# EAGLE board untitled (EAGLE 9.6.2), part 1 of 2
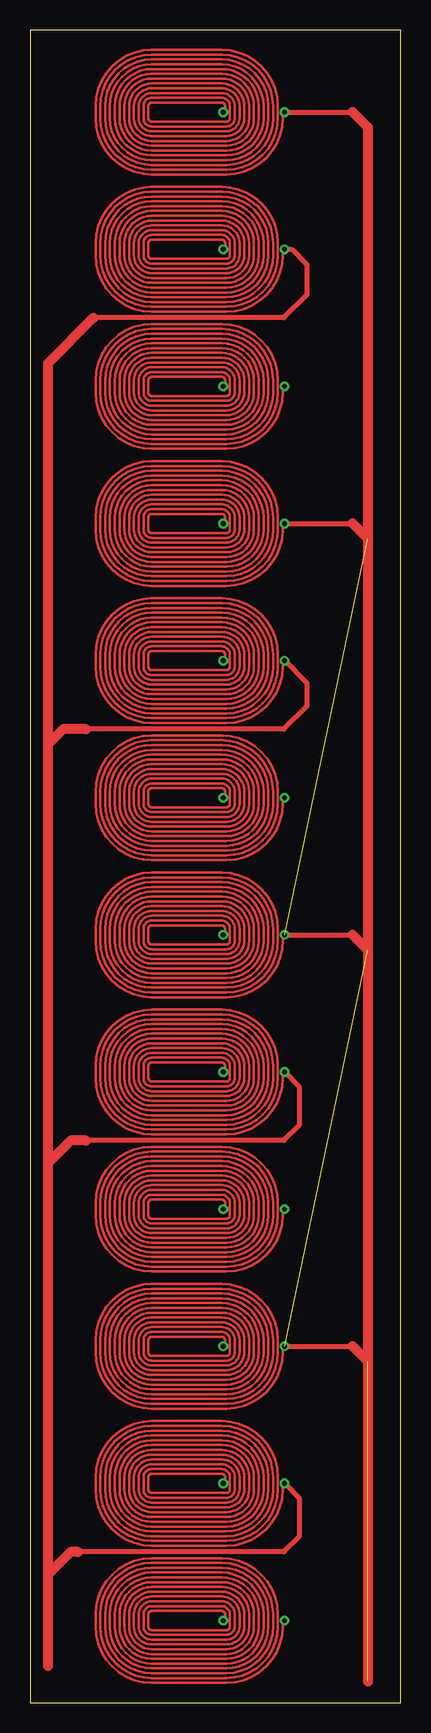
[diagram p0: board, top side]

Size 30.9 x 139.43 mm. Coordinates in mm from the lower left corner, seen from the top.
Outline: 0,0 30.9,0 30.9,139.43 0,139.43 0,0
Copper layers (1*16): Top 0.035mm / dielectric 1.5mm / Bottom 0.035mm
Design rules "default": minimum track width 6mil, minimum drill 0.35mm, track to track 6mil, track to pad 6mil, pad to pad 6mil, via to via 6mil, smd to smd 6mil, copper to edge 40mil, drill to drill 6mil, minimum pad ring 10mil, minimum via ring 8mil, stop-mask expansion 4mil, vias tented up to drill 0mil, thermal gap 10mil

## Placement (x,y rotation side)

## Tracks (layer width: path | path; a pad name or v marks a point on that pad's centre or on a via)
S$1  (via drill 0.4 pad 0.5)
  Top 0.2: v16.11,18.28 16.26,18.28 16.26,18.78 16.26,18.83 16.25,18.87 16.23,18.92 16.2,18.96 16.17,18.99 16.14,19.02 16.1,19.05 16.05,19.07 16.01,19.08 15.96,19.08 10.16,19.08 10.11,19.08 10.07,19.07 10.02,19.05 9.98,19.02 9.95,18.99 9.92,18.96 9.89,18.92 9.88,18.87 9.86,18.83 9.86,18.78 9.86,17.78 9.86,17.73 9.88,17.69 9.89,17.64 9.92,17.6 9.95,17.57 9.98,17.54 10.02,17.51 10.07,17.5 10.11,17.48 10.16,17.48 16.36,17.48 16.41,17.48 16.45,17.5 16.5,17.51 16.54,17.54 16.57,17.57 16.6,17.6 16.63,17.64 16.64,17.69 16.66,17.73 16.66,17.78 16.66,18.78 16.65,18.89 16.63,19 16.58,19.1 16.53,19.19 16.45,19.28 16.37,19.35 16.28,19.4 16.18,19.45 16.07,19.47 15.96,19.48 10.16,19.48 10.05,19.47 9.94,19.45 9.84,19.4 9.75,19.35 9.66,19.28 9.59,19.19 9.54,19.1 9.49,19 9.47,18.89 9.46,18.78 9.46,17.78 9.47,17.67 9.49,17.56 9.54,17.46 9.59,17.37 9.66,17.29 9.75,17.21 9.84,17.16 9.94,17.11 10.05,17.09 10.16,17.08 16.36,17.08 16.47,17.09 16.58,17.11 16.68,17.16 16.77,17.21 16.86,17.29 16.93,17.37 16.98,17.46 17.03,17.56 17.05,17.67 17.06,17.78 17.06,18.78 17.05,18.95 17.01,19.12 16.94,19.28 16.85,19.43 16.74,19.56 16.61,19.67 16.46,19.76 16.3,19.83 16.13,19.87 15.96,19.88 10.16,19.88 9.99,19.87 9.82,19.83 9.66,19.76 9.51,19.67 9.38,19.56 9.27,19.43 9.18,19.28 9.11,19.12 9.07,18.95 9.06,18.78 9.06,17.78 9.07,17.61 9.11,17.44 9.18,17.28 9.27,17.13 9.38,17 9.51,16.89 9.66,16.8 9.82,16.73 9.99,16.69 10.16,16.68 16.36,16.68 16.53,16.69 16.7,16.73 16.86,16.8 17.01,16.89 17.14,17 17.25,17.13 17.34,17.28 17.41,17.44 17.45,17.61 17.46,17.78 17.46,18.78 17.44,19.02 17.39,19.24 17.3,19.46 17.17,19.66 17.02,19.84 16.84,19.99 16.64,20.12 16.42,20.21 16.2,20.26 15.96,20.28 10.16,20.28 9.93,20.26 9.7,20.21 9.48,20.12 9.28,19.99 9.1,19.84 8.95,19.66 8.82,19.46 8.73,19.24 8.68,19.02 8.66,18.78 8.66,17.78 8.68,17.55 8.73,17.32 8.82,17.1 8.95,16.9 9.1,16.72 9.28,16.57 9.48,16.44 9.7,16.35 9.93,16.3 10.16,16.28 16.36,16.28 16.59,16.3 16.82,16.35 17.04,16.44 17.24,16.57 17.42,16.72 17.57,16.9 17.7,17.1 17.79,17.32 17.84,17.55 17.86,17.78 17.86,18.78 17.84,19.08 17.77,19.37 17.65,19.64 17.5,19.9 17.3,20.12 17.08,20.32 16.82,20.47 16.55,20.59 16.26,20.66 15.96,20.68 10.16,20.68 9.86,20.66 9.57,20.59 9.3,20.47 9.04,20.32 8.82,20.12 8.62,19.9 8.47,19.64 8.35,19.37 8.28,19.08 8.26,18.78 8.26,17.78 8.28,17.48 8.35,17.19 8.47,16.92 8.62,16.66 8.82,16.44 9.04,16.24 9.3,16.09 9.57,15.97 9.86,15.9 10.16,15.88 16.36,15.88 16.66,15.9 16.95,15.97 17.22,16.09 17.48,16.24 17.7,16.44 17.9,16.66 18.05,16.92 18.17,17.19 18.24,17.48 18.26,17.78 18.26,18.78 18.23,19.14 18.15,19.49 18.01,19.82 17.82,20.13 17.59,20.41 17.31,20.64 17,20.83 16.67,20.97 16.32,21.05 15.96,21.08 10.16,21.08 9.8,21.05 9.45,20.97 9.12,20.83 8.81,20.64 8.53,20.41 8.3,20.13 8.11,19.82 7.97,19.49 7.89,19.14 7.86,18.78 7.86,17.78 7.89,17.42 7.97,17.07 8.11,16.74 8.3,16.43 8.53,16.15 8.81,15.92 9.12,15.73 9.45,15.59 9.8,15.51 10.16,15.48 16.36,15.48 16.72,15.51 17.07,15.59 17.4,15.73 17.71,15.92 17.99,16.15 18.22,16.43 18.41,16.74 18.55,17.07 18.63,17.42 18.66,17.78 18.66,18.78 18.63,19.2 18.53,19.61 18.37,20.01 18.14,20.37 17.87,20.69 17.55,20.96 17.19,21.19 16.79,21.35 16.38,21.45 15.96,21.48 10.16,21.48 9.74,21.45 9.33,21.35 8.93,21.19 8.57,20.96 8.25,20.69 7.98,20.37 7.75,20.01 7.59,19.61 7.49,19.2 7.46,18.78 7.46,17.78 7.49,17.36 7.59,16.95 7.75,16.55 7.98,16.19 8.25,15.87 8.57,15.6 8.93,15.37 9.33,15.21 9.74,15.11 10.16,15.08 16.36,15.08 16.78,15.11 17.19,15.21 17.59,15.37 17.95,15.6 18.27,15.87 18.54,16.19 18.77,16.55 18.93,16.95 19.03,17.36 19.06,17.78 19.06,18.78 19.02,19.27 18.91,19.74 18.72,20.19 18.47,20.6 18.15,20.97 17.78,21.29 17.37,21.54 16.92,21.73 16.45,21.84 15.96,21.88 10.16,21.88 9.68,21.84 9.2,21.73 8.75,21.54 8.34,21.29 7.97,20.97 7.65,20.6 7.4,20.19 7.21,19.74 7.1,19.27 7.06,18.78 7.06,17.78 7.1,17.3 7.21,16.82 7.4,16.37 7.65,15.96 7.97,15.59 8.34,15.27 8.75,15.02 9.2,14.83 9.68,14.72 10.16,14.68 16.36,14.68 16.84,14.72 17.32,14.83 17.77,15.02 18.18,15.27 18.55,15.59 18.87,15.96 19.12,16.37 19.31,16.82 19.42,17.3 19.46,17.78 19.46,18.78 19.42,19.33 19.29,19.86 19.08,20.37 18.79,20.84 18.44,21.26 18.02,21.61 17.55,21.9 17.04,22.11 16.51,22.24 15.96,22.28 10.16,22.28 9.61,22.24 9.08,22.11 8.57,21.9 8.1,21.61 7.69,21.26 7.33,20.84 7.04,20.37 6.83,19.86 6.7,19.33 6.66,18.78 6.66,17.78 6.7,17.23 6.83,16.7 7.04,16.19 7.33,15.72 7.69,15.31 8.1,14.95 8.57,14.66 9.08,14.45 9.61,14.32 10.16,14.28 16.36,14.28 16.91,14.32 17.44,14.45 17.95,14.66 18.42,14.95 18.84,15.31 19.19,15.72 19.48,16.19 19.69,16.7 19.82,17.23 19.86,17.78 19.86,18.78 19.81,19.39 19.67,19.98 19.44,20.55 19.12,21.07 18.72,21.54 18.25,21.94 17.73,22.26 17.16,22.49 16.57,22.63 15.96,22.68 10.16,22.68 9.55,22.63 8.96,22.49 8.39,22.26 7.87,21.94 7.4,21.54 7,21.07 6.69,20.55 6.45,19.98 6.31,19.39 6.26,18.78 6.26,17.78 6.31,17.17 6.45,16.58 6.69,16.01 7,15.49 7.4,15.02 7.87,14.63 8.39,14.31 8.96,14.07 9.55,13.93 10.16,13.88 16.36,13.88 16.97,13.93 17.57,14.07 18.13,14.31 18.65,14.63 19.12,15.02 19.52,15.49 19.84,16.01 20.07,16.58 20.21,17.17 20.26,17.78 20.26,18.78 20.21,19.45 20.05,20.11 19.79,20.73 19.44,21.31 19,21.82 18.49,22.26 17.91,22.61 17.29,22.87 16.63,23.03 15.96,23.08 10.16,23.08 9.49,23.03 8.83,22.87 8.21,22.61 7.63,22.26 7.12,21.82 6.68,21.31 6.33,20.73 6.07,20.11 5.91,19.45 5.86,18.78 5.86,17.78 5.91,17.11 6.07,16.45 6.33,15.83 6.68,15.25 7.12,14.74 7.63,14.3 8.21,13.95 8.83,13.69 9.49,13.53 10.16,13.48 16.36,13.48 17.03,13.53 17.69,13.69 18.31,13.95 18.89,14.3 19.4,14.74 19.84,15.25 20.19,15.83 20.45,16.45 20.61,17.11 20.66,17.78 20.66,18.78 20.6,19.52 20.43,20.23 20.15,20.91 19.76,21.54 19.28,22.1 18.72,22.58 18.09,22.97 17.41,23.25 16.7,23.42 15.96,23.48 10.16,23.48 9.43,23.42 8.71,23.25 8.03,22.97 7.4,22.58 6.84,22.1 6.36,21.54 5.97,20.91 5.69,20.23 5.52,19.52 5.46,18.78 5.46,17.78 5.52,17.05 5.69,16.33 5.97,15.65 6.36,15.02 6.84,14.46 7.4,13.98 8.03,13.59 8.71,13.31 9.43,13.14 10.16,13.08 16.36,13.08 17.09,13.14 17.81,13.31 18.49,13.59 19.12,13.98 19.68,14.46 20.16,15.02 20.55,15.65 20.83,16.33 21,17.05 21.06,17.78 21.06,18.28 v21.21,18.28
  Top 0.2: v16.11,121.15 16.26,121.15 16.26,121.65 16.26,121.7 16.25,121.74 16.23,121.79 16.2,121.83 16.17,121.86 16.14,121.89 16.1,121.92 16.05,121.94 16.01,121.95 15.96,121.95 10.16,121.95 10.11,121.95 10.07,121.94 10.02,121.92 9.98,121.89 9.95,121.86 9.92,121.83 9.89,121.79 9.88,121.74 9.86,121.7 9.86,121.65 9.86,120.65 9.86,120.6 9.88,120.56 9.89,120.51 9.92,120.47 9.95,120.44 9.98,120.41 10.02,120.38 10.07,120.36 10.11,120.35 10.16,120.35 16.36,120.35 16.41,120.35 16.45,120.36 16.5,120.38 16.54,120.41 16.57,120.44 16.6,120.47 16.63,120.51 16.64,120.56 16.66,120.6 16.66,120.65 16.66,121.65 16.65,121.76 16.63,121.87 16.58,121.97 16.53,122.06 16.45,122.14 16.37,122.22 16.28,122.27 16.18,122.32 16.07,122.34 15.96,122.35 10.16,122.35 10.05,122.34 9.94,122.32 9.84,122.27 9.75,122.22 9.66,122.14 9.59,122.06 9.54,121.97 9.49,121.87 9.47,121.76 9.46,121.65 9.46,120.65 9.47,120.54 9.49,120.43 9.54,120.33 9.59,120.24 9.66,120.16 9.75,120.08 9.84,120.03 9.94,119.98 10.05,119.96 10.16,119.95 16.36,119.95 16.47,119.96 16.58,119.98 16.68,120.03 16.77,120.08 16.86,120.16 16.93,120.24 16.98,120.33 17.03,120.43 17.05,120.54 17.06,120.65 17.06,121.65 17.05,121.82 17.01,121.99 16.94,122.15 16.85,122.3 16.74,122.43 16.61,122.54 16.46,122.63 16.3,122.7 16.13,122.74 15.96,122.75 10.16,122.75 9.99,122.74 9.82,122.7 9.66,122.63 9.51,122.54 9.38,122.43 9.27,122.3 9.18,122.15 9.11,121.99 9.07,121.82 9.06,121.65 9.06,120.65 9.07,120.48 9.11,120.31 9.18,120.15 9.27,120 9.38,119.87 9.51,119.76 9.66,119.67 9.82,119.6 9.99,119.56 10.16,119.55 16.36,119.55 16.53,119.56 16.7,119.6 16.86,119.67 17.01,119.76 17.14,119.87 17.25,120 17.34,120.15 17.41,120.31 17.45,120.48 17.46,120.65 17.46,121.65 17.44,121.89 17.39,122.11 17.3,122.33 17.17,122.53 17.02,122.71 16.84,122.86 16.64,122.99 16.42,123.08 16.2,123.13 15.96,123.15 10.16,123.15 9.93,123.13 9.7,123.08 9.48,122.99 9.28,122.86 9.1,122.71 8.95,122.53 8.82,122.33 8.73,122.11 8.68,121.89 8.66,121.65 8.66,120.65 8.68,120.42 8.73,120.19 8.82,119.97 8.95,119.77 9.1,119.59 9.28,119.44 9.48,119.31 9.7,119.22 9.93,119.17 10.16,119.15 16.36,119.15 16.59,119.17 16.82,119.22 17.04,119.31 17.24,119.44 17.42,119.59 17.57,119.77 17.7,119.97 17.79,120.19 17.84,120.42 17.86,120.65 17.86,121.65 17.84,121.95 17.77,122.24 17.65,122.51 17.5,122.77 17.3,122.99 17.08,123.19 16.82,123.34 16.55,123.46 16.26,123.53 15.96,123.55 10.16,123.55 9.86,123.53 9.57,123.46 9.3,123.34 9.04,123.19 8.82,122.99 8.62,122.77 8.47,122.51 8.35,122.24 8.28,121.95 8.26,121.65 8.26,120.65 8.28,120.35 8.35,120.06 8.47,119.79 8.62,119.53 8.82,119.31 9.04,119.11 9.3,118.96 9.57,118.84 9.86,118.77 10.16,118.75 16.36,118.75 16.66,118.77 16.95,118.84 17.22,118.96 17.48,119.11 17.7,119.31 17.9,119.53 18.05,119.79 18.17,120.06 18.24,120.35 18.26,120.65 18.26,121.65 18.23,122.01 18.15,122.36 18.01,122.69 17.82,123 17.59,123.28 17.31,123.51 17,123.7 16.67,123.84 16.32,123.92 15.96,123.95 10.16,123.95 9.8,123.92 9.45,123.84 9.12,123.7 8.81,123.51 8.53,123.28 8.3,123 8.11,122.69 7.97,122.36 7.89,122.01 7.86,121.65 7.86,120.65 7.89,120.29 7.97,119.94 8.11,119.61 8.3,119.3 8.53,119.02 8.81,118.79 9.12,118.6 9.45,118.46 9.8,118.38 10.16,118.35 16.36,118.35 16.72,118.38 17.07,118.46 17.4,118.6 17.71,118.79 17.99,119.02 18.22,119.3 18.41,119.61 18.55,119.94 18.63,120.29 18.66,120.65 18.66,121.65 18.63,122.07 18.53,122.48 18.37,122.88 18.14,123.24 17.87,123.56 17.55,123.83 17.19,124.06 16.79,124.22 16.38,124.32 15.96,124.35 10.16,124.35 9.74,124.32 9.33,124.22 8.93,124.06 8.57,123.83 8.25,123.56 7.98,123.24 7.75,122.88 7.59,122.48 7.49,122.07 7.46,121.65 7.46,120.65 7.49,120.23 7.59,119.82 7.75,119.42 7.98,119.06 8.25,118.74 8.57,118.47 8.93,118.24 9.33,118.08 9.74,117.98 10.16,117.95 16.36,117.95 16.78,117.98 17.19,118.08 17.59,118.24 17.95,118.47 18.27,118.74 18.54,119.06 18.77,119.42 18.93,119.82 19.03,120.23 19.06,120.65 19.06,121.65 19.02,122.14 18.91,122.61 18.72,123.06 18.47,123.47 18.15,123.84 17.78,124.16 17.37,124.41 16.92,124.6 16.45,124.71 15.96,124.75 10.16,124.75 9.68,124.71 9.2,124.6 8.75,124.41 8.34,124.16 7.97,123.84 7.65,123.47 7.4,123.06 7.21,122.61 7.1,122.14 7.06,121.65 7.06,120.65 7.1,120.17 7.21,119.69 7.4,119.24 7.65,118.83 7.97,118.46 8.34,118.14 8.75,117.89 9.2,117.7 9.68,117.59 10.16,117.55 16.36,117.55 16.84,117.59 17.32,117.7 17.77,117.89 18.18,118.14 18.55,118.46 18.87,118.83 19.12,119.24 19.31,119.69 19.42,120.17 19.46,120.65 19.46,121.65 19.42,122.2 19.29,122.73 19.08,123.24 18.79,123.71 18.44,124.12 18.02,124.48 17.55,124.77 17.04,124.98 16.51,125.11 15.96,125.15 10.16,125.15 9.61,125.11 9.08,124.98 8.57,124.77 8.1,124.48 7.69,124.12 7.33,123.71 7.04,123.24 6.83,122.73 6.7,122.2 6.66,121.65 6.66,120.65 6.7,120.1 6.83,119.57 7.04,119.06 7.33,118.59 7.69,118.17 8.1,117.82 8.57,117.53 9.08,117.32 9.61,117.19 10.16,117.15 16.36,117.15 16.91,117.19 17.44,117.32 17.95,117.53 18.42,117.82 18.84,118.17 19.19,118.59 19.48,119.06 19.69,119.57 19.82,120.1 19.86,120.65 19.86,121.65 19.81,122.26 19.67,122.86 19.44,123.42 19.12,123.94 18.72,124.41 18.25,124.81 17.73,125.12 17.16,125.36 16.57,125.5 15.96,125.55 10.16,125.55 9.55,125.5 8.96,125.36 8.39,125.12 7.87,124.81 7.4,124.41 7,123.94 6.69,123.42 6.45,122.86 6.31,122.26 6.26,121.65 6.26,120.65 6.31,120.04 6.45,119.45 6.69,118.88 7,118.36 7.4,117.89 7.87,117.5 8.39,117.17 8.96,116.94 9.55,116.8 10.16,116.75 16.36,116.75 16.97,116.8 17.57,116.94 18.13,117.17 18.65,117.5 19.12,117.89 19.52,118.36 19.84,118.88 20.07,119.45 20.21,120.04 20.26,120.65 20.26,121.65 20.21,122.32 20.05,122.98 19.79,123.6 19.44,124.18 19,124.69 18.49,125.13 17.91,125.48 17.29,125.74 16.63,125.9 15.96,125.95 10.16,125.95 9.49,125.9 8.83,125.74 8.21,125.48 7.63,125.13 7.12,124.69 6.68,124.18 6.33,123.6 6.07,122.98 5.91,122.32 5.86,121.65 5.86,120.65 5.91,119.98 6.07,119.32 6.33,118.7 6.68,118.12 7.12,117.61 7.63,117.17 8.21,116.82 8.83,116.56 9.49,116.4 10.16,116.35 16.36,116.35 17.03,116.4 17.69,116.56 18.31,116.82 18.89,117.17 19.4,117.61 19.84,118.12 20.19,118.7 20.45,119.32 20.61,119.98 20.66,120.65 20.66,121.65 20.6,122.39 20.43,123.1 20.15,123.78 19.76,124.41 19.28,124.97 18.72,125.45 18.09,125.84 17.41,126.12 16.7,126.29 15.96,126.35 10.16,126.35 9.43,126.29 8.71,126.12 8.03,125.84 7.4,125.45 6.84,124.97 6.36,124.41 5.97,123.78 5.69,123.1 5.52,122.39 5.46,121.65 5.46,120.65 5.52,119.92 5.69,119.2 5.97,118.52 6.36,117.89 6.84,117.33 7.4,116.85 8.03,116.46 8.71,116.18 9.43,116.01 10.16,115.95 16.36,115.95 17.09,116.01 17.81,116.18 18.49,116.46 19.12,116.85 19.68,117.33 20.16,117.89 20.55,118.52 20.83,119.2 21,119.92 21.06,120.65 21.06,121.15 v21.21,121.15
  Top 0.2: v16.11,86.86 16.26,86.86 16.26,87.36 16.26,87.41 16.25,87.45 16.23,87.5 16.2,87.54 16.17,87.57 16.14,87.6 16.1,87.63 16.05,87.64 16.01,87.66 15.96,87.66 10.16,87.66 10.11,87.66 10.07,87.64 10.02,87.63 9.98,87.6 9.95,87.57 9.92,87.54 9.89,87.5 9.88,87.45 9.86,87.41 9.86,87.36 9.86,86.36 9.86,86.31 9.88,86.27 9.89,86.22 9.92,86.18 9.95,86.15 9.98,86.12 10.02,86.09 10.07,86.08 10.11,86.06 10.16,86.06 16.36,86.06 16.41,86.06 16.45,86.08 16.5,86.09 16.54,86.12 16.57,86.15 16.6,86.18 16.63,86.22 16.64,86.27 16.66,86.31 16.66,86.36 16.66,87.36 16.65,87.47 16.63,87.58 16.58,87.68 16.53,87.77 16.45,87.86 16.37,87.93 16.28,87.98 16.18,88.03 16.07,88.05 15.96,88.06 10.16,88.06 10.05,88.05 9.94,88.03 9.84,87.98 9.75,87.93 9.66,87.86 9.59,87.77 9.54,87.68 9.49,87.58 9.47,87.47 9.46,87.36 9.46,86.36 9.47,86.25 9.49,86.14 9.54,86.04 9.59,85.95 9.66,85.86 9.75,85.79 9.84,85.74 9.94,85.69 10.05,85.67 10.16,85.66 16.36,85.66 16.47,85.67 16.58,85.69 16.68,85.74 16.77,85.79 16.86,85.86 16.93,85.95 16.98,86.04 17.03,86.14 17.05,86.25 17.06,86.36 17.06,87.36 17.05,87.53 17.01,87.7 16.94,87.86 16.85,88.01 16.74,88.14 16.61,88.25 16.46,88.34 16.3,88.41 16.13,88.45 15.96,88.46 10.16,88.46 9.99,88.45 9.82,88.41 9.66,88.34 9.51,88.25 9.38,88.14 9.27,88.01 9.18,87.86 9.11,87.7 9.07,87.53 9.06,87.36 9.06,86.36 9.07,86.19 9.11,86.02 9.18,85.86 9.27,85.71 9.38,85.58 9.51,85.47 9.66,85.38 9.82,85.31 9.99,85.27 10.16,85.26 16.36,85.26 16.53,85.27 16.7,85.31 16.86,85.38 17.01,85.47 17.14,85.58 17.25,85.71 17.34,85.86 17.41,86.02 17.45,86.19 17.46,86.36 17.46,87.36 17.44,87.59 17.39,87.82 17.3,88.04 17.17,88.24 17.02,88.42 16.84,88.57 16.64,88.7 16.42,88.79 16.2,88.84 15.96,88.86 10.16,88.86 9.93,88.84 9.7,88.79 9.48,88.7 9.28,88.57 9.1,88.42 8.95,88.24 8.82,88.04 8.73,87.82 8.68,87.59 8.66,87.36 8.66,86.36 8.68,86.12 8.73,85.9 8.82,85.68 8.95,85.48 9.1,85.3 9.28,85.15 9.48,85.02 9.7,84.93 9.93,84.88 10.16,84.86 16.36,84.86 16.59,84.88 16.82,84.93 17.04,85.02 17.24,85.15 17.42,85.3 17.57,85.48 17.7,85.68 17.79,85.9 17.84,86.12 17.86,86.36 17.86,87.36 17.84,87.66 17.77,87.95 17.65,88.22 17.5,88.48 17.3,88.7 17.08,88.9 16.82,89.05 16.55,89.17 16.26,89.24 15.96,89.26 10.16,89.26 9.86,89.24 9.57,89.17 9.3,89.05 9.04,88.9 8.82,88.7 8.62,88.48 8.47,88.22 8.35,87.95 8.28,87.66 8.26,87.36 8.26,86.36 8.28,86.06 8.35,85.77 8.47,85.5 8.62,85.24 8.82,85.02 9.04,84.82 9.3,84.67 9.57,84.55 9.86,84.48 10.16,84.46 16.36,84.46 16.66,84.48 16.95,84.55 17.22,84.67 17.48,84.82 17.7,85.02 17.9,85.24 18.05,85.5 18.17,85.77 18.24,86.06 18.26,86.36 18.26,87.36 18.23,87.72 18.15,88.07 18.01,88.4 17.82,88.71 17.59,88.99 17.31,89.22 17,89.41 16.67,89.55 16.32,89.63 15.96,89.66 10.16,89.66 9.8,89.63 9.45,89.55 9.12,89.41 8.81,89.22 8.53,88.99 8.3,88.71 8.11,88.4 7.97,88.07 7.89,87.72 7.86,87.36 7.86,86.36 7.89,86 7.97,85.65 8.11,85.32 8.3,85.01 8.53,84.73 8.81,84.5 9.12,84.31 9.45,84.17 9.8,84.09 10.16,84.06 16.36,84.06 16.72,84.09 17.07,84.17 17.4,84.31 17.71,84.5 17.99,84.73 18.22,85.01 18.41,85.32 18.55,85.65 18.63,86 18.66,86.36 18.66,87.36 18.63,87.78 18.53,88.19 18.37,88.59 18.14,88.95 17.87,89.27 17.55,89.54 17.19,89.77 16.79,89.93 16.38,90.03 15.96,90.06 10.16,90.06 9.74,90.03 9.33,89.93 8.93,89.77 8.57,89.54 8.25,89.27 7.98,88.95 7.75,88.59 7.59,88.19 7.49,87.78 7.46,87.36 7.46,86.36 7.49,85.94 7.59,85.53 7.75,85.13 7.98,84.77 8.25,84.45 8.57,84.18 8.93,83.95 9.33,83.79 9.74,83.69 10.16,83.66 16.36,83.66 16.78,83.69 17.19,83.79 17.59,83.95 17.95,84.18 18.27,84.45 18.54,84.77 18.77,85.13 18.93,85.53 19.03,85.94 19.06,86.36 19.06,87.36 19.02,87.84 18.91,88.32 18.72,88.77 18.47,89.18 18.15,89.55 17.78,89.87 17.37,90.12 16.92,90.31 16.45,90.42 15.96,90.46 10.16,90.46 9.68,90.42 9.2,90.31 8.75,90.12 8.34,89.87 7.97,89.55 7.65,89.18 7.4,88.77 7.21,88.32 7.1,87.84 7.06,87.36 7.06,86.36 7.1,85.88 7.21,85.4 7.4,84.95 7.65,84.54 7.97,84.17 8.34,83.85 8.75,83.6 9.2,83.41 9.68,83.3 10.16,83.26 16.36,83.26 16.84,83.3 17.32,83.41 17.77,83.6 18.18,83.85 18.55,84.17 18.87,84.54 19.12,84.95 19.31,85.4 19.42,85.88 19.46,86.36 19.46,87.36 19.42,87.91 19.29,88.44 19.08,88.95 18.79,89.42 18.44,89.84 18.02,90.19 17.55,90.48 17.04,90.69 16.51,90.82 15.96,90.86 10.16,90.86 9.61,90.82 9.08,90.69 8.57,90.48 8.1,90.19 7.69,89.84 7.33,89.42 7.04,88.95 6.83,88.44 6.7,87.91 6.66,87.36 6.66,86.36 6.7,85.81 6.83,85.28 7.04,84.77 7.33,84.3 7.69,83.89 8.1,83.53 8.57,83.24 9.08,83.03 9.61,82.9 10.16,82.86 16.36,82.86 16.91,82.9 17.44,83.03 17.95,83.24 18.42,83.53 18.84,83.89 19.19,84.3 19.48,84.77 19.69,85.28 19.82,85.81 19.86,86.36 19.86,87.36 19.81,87.97 19.67,88.56 19.44,89.13 19.12,89.65 18.72,90.12 18.25,90.52 17.73,90.84 17.16,91.07 16.57,91.21 15.96,91.26 10.16,91.26 9.55,91.21 8.96,91.07 8.39,90.84 7.87,90.52 7.4,90.12 7,89.65 6.69,89.13 6.45,88.56 6.31,87.97 6.26,87.36 6.26,86.36 6.31,85.75 6.45,85.16 6.69,84.59 7,84.07 7.4,83.6 7.87,83.2 8.39,82.89 8.96,82.65 9.55,82.51 10.16,82.46 16.36,82.46 16.97,82.51 17.57,82.65 18.13,82.89 18.65,83.2 19.12,83.6 19.52,84.07 19.84,84.59 20.07,85.16 20.21,85.75 20.26,86.36 20.26,87.36 20.21,88.03 20.05,88.69 19.79,89.31 19.44,89.89 19,90.4 18.49,90.84 17.91,91.19 17.29,91.45 16.63,91.61 15.96,91.66 10.16,91.66 9.49,91.61 8.83,91.45 8.21,91.19 7.63,90.84 7.12,90.4 6.68,89.89 6.33,89.31 6.07,88.69 5.91,88.03 5.86,87.36 5.86,86.36 5.91,85.69 6.07,85.03 6.33,84.41 6.68,83.83 7.12,83.32 7.63,82.88 8.21,82.53 8.83,82.27 9.49,82.11 10.16,82.06 16.36,82.06 17.03,82.11 17.69,82.27 18.31,82.53 18.89,82.88 19.4,83.32 19.84,83.83 20.19,84.41 20.45,85.03 20.61,85.69 20.66,86.36 20.66,87.36 20.6,88.09 20.43,88.81 20.15,89.49 19.76,90.12 19.28,90.68 18.72,91.16 18.09,91.55 17.41,91.83 16.7,92 15.96,92.06 10.16,92.06 9.43,92 8.71,91.83 8.03,91.55 7.4,91.16 6.84,90.68 6.36,90.12 5.97,89.49 5.69,88.81 5.52,88.09 5.46,87.36 5.46,86.36 5.52,85.62 5.69,84.91 5.97,84.23 6.36,83.6 6.84,83.04 7.4,82.56 8.03,82.17 8.71,81.89 9.43,81.72 10.16,81.66 16.36,81.66 17.09,81.72 17.81,81.89 18.49,82.17 19.12,82.56 19.68,83.04 20.16,83.6 20.55,84.23 20.83,84.91 21,85.62 21.06,86.36 21.06,86.86 v21.21,86.86
  Top 0.2: v16.11,52.57 16.26,52.57 16.26,53.07 16.26,53.12 16.25,53.16 16.23,53.21 16.2,53.25 16.17,53.28 16.14,53.31 16.1,53.34 16.05,53.36 16.01,53.37 15.96,53.37 10.16,53.37 10.11,53.37 10.07,53.36 10.02,53.34 9.98,53.31 9.95,53.28 9.92,53.25 9.89,53.21 9.88,53.16 9.86,53.12 9.86,53.07 9.86,52.07 9.86,52.02 9.88,51.98 9.89,51.93 9.92,51.89 9.95,51.86 9.98,51.83 10.02,51.8 10.07,51.79 10.11,51.77 10.16,51.77 16.36,51.77 16.41,51.77 16.45,51.79 16.5,51.8 16.54,51.83 16.57,51.86 16.6,51.89 16.63,51.93 16.64,51.98 16.66,52.02 16.66,52.07 16.66,53.07 16.65,53.18 16.63,53.29 16.58,53.39 16.53,53.48 16.45,53.56 16.37,53.64 16.28,53.69 16.18,53.74 16.07,53.76 15.96,53.77 10.16,53.77 10.05,53.76 9.94,53.74 9.84,53.69 9.75,53.64 9.66,53.56 9.59,53.48 9.54,53.39 9.49,53.29 9.47,53.18 9.46,53.07 9.46,52.07 9.47,51.96 9.49,51.85 9.54,51.75 9.59,51.66 9.66,51.58 9.75,51.5 9.84,51.45 9.94,51.4 10.05,51.38 10.16,51.37 16.36,51.37 16.47,51.38 16.58,51.4 16.68,51.45 16.77,51.5 16.86,51.58 16.93,51.66 16.98,51.75 17.03,51.85 17.05,51.96 17.06,52.07 17.06,53.07 17.05,53.24 17.01,53.41 16.94,53.57 16.85,53.72 16.74,53.85 16.61,53.96 16.46,54.05 16.3,54.12 16.13,54.16 15.96,54.17 10.16,54.17 9.99,54.16 9.82,54.12 9.66,54.05 9.51,53.96 9.38,53.85 9.27,53.72 9.18,53.57 9.11,53.41 9.07,53.24 9.06,53.07 9.06,52.07 9.07,51.9 9.11,51.73 9.18,51.57 9.27,51.42 9.38,51.29 9.51,51.18 9.66,51.09 9.82,51.02 9.99,50.98 10.16,50.97 16.36,50.97 16.53,50.98 16.7,51.02 16.86,51.09 17.01,51.18 17.14,51.29 17.25,51.42 17.34,51.57 17.41,51.73 17.45,51.9 17.46,52.07 17.46,53.07 17.44,53.3 17.39,53.53 17.3,53.75 17.17,53.95 17.02,54.13 16.84,54.28 16.64,54.41 16.42,54.5 16.2,54.55 15.96,54.57 10.16,54.57 9.93,54.55 9.7,54.5 9.48,54.41 9.28,54.28 9.1,54.13 8.95,53.95 8.82,53.75 8.73,53.53 8.68,53.3 8.66,53.07 8.66,52.07 8.68,51.84 8.73,51.61 8.82,51.39 8.95,51.19 9.1,51.01 9.28,50.86 9.48,50.73 9.7,50.64 9.93,50.59 10.16,50.57 16.36,50.57 16.59,50.59 16.82,50.64 17.04,50.73 17.24,50.86 17.42,51.01 17.57,51.19 17.7,51.39 17.79,51.61 17.84,51.84 17.86,52.07 17.86,53.07 17.84,53.37 17.77,53.66 17.65,53.93 17.5,54.19 17.3,54.41 17.08,54.61 16.82,54.76 16.55,54.88 16.26,54.95 15.96,54.97 10.16,54.97 9.86,54.95 9.57,54.88 9.3,54.76 9.04,54.61 8.82,54.41 8.62,54.19 8.47,53.93 8.35,53.66 8.28,53.37 8.26,53.07 8.26,52.07 8.28,51.77 8.35,51.48 8.47,51.21 8.62,50.95 8.82,50.73 9.04,50.53 9.3,50.38 9.57,50.26 9.86,50.19 10.16,50.17 16.36,50.17 16.66,50.19 16.95,50.26 17.22,50.38 17.48,50.53 17.7,50.73 17.9,50.95 18.05,51.21 18.17,51.48 18.24,51.77 18.26,52.07 18.26,53.07 18.23,53.43 18.15,53.78 18.01,54.11 17.82,54.42 17.59,54.7 17.31,54.93 17,55.12 16.67,55.26 16.32,55.34 15.96,55.37 10.16,55.37 9.8,55.34 9.45,55.26 9.12,55.12 8.81,54.93 8.53,54.7 8.3,54.42 8.11,54.11 7.97,53.78 7.89,53.43 7.86,53.07 7.86,52.07 7.89,51.71 7.97,51.36 8.11,51.03 8.3,50.72 8.53,50.44 8.81,50.21 9.12,50.02 9.45,49.88 9.8,49.8 10.16,49.77 16.36,49.77 16.72,49.8 17.07,49.88 17.4,50.02 17.71,50.21 17.99,50.44 18.22,50.72 18.41,51.03 18.55,51.36 18.63,51.71 18.66,52.07 18.66,53.07 18.63,53.49 18.53,53.9 18.37,54.3 18.14,54.66 17.87,54.98 17.55,55.25 17.19,55.48 16.79,55.64 16.38,55.74 15.96,55.77 10.16,55.77 9.74,55.74 9.33,55.64 8.93,55.48 8.57,55.25 8.25,54.98 7.98,54.66 7.75,54.3 7.59,53.9 7.49,53.49 7.46,53.07 7.46,52.07 7.49,51.65 7.59,51.24 7.75,50.84 7.98,50.48 8.25,50.16 8.57,49.89 8.93,49.66 9.33,49.5 9.74,49.4 10.16,49.37 16.36,49.37 16.78,49.4 17.19,49.5 17.59,49.66 17.95,49.89 18.27,50.16 18.54,50.48 18.77,50.84 18.93,51.24 19.03,51.65 19.06,52.07 19.06,53.07 19.02,53.55 18.91,54.03 18.72,54.48 18.47,54.89 18.15,55.26 17.78,55.58 17.37,55.83 16.92,56.02 16.45,56.13 15.96,56.17 10.16,56.17 9.68,56.13 9.2,56.02 8.75,55.83 8.34,55.58 7.97,55.26 7.65,54.89 7.4,54.48 7.21,54.03 7.1,53.55 7.06,53.07 7.06,52.07 7.1,51.59 7.21,51.11 7.4,50.66 7.65,50.25 7.97,49.88 8.34,49.56 8.75,49.31 9.2,49.12 9.68,49.01 10.16,48.97 16.36,48.97 16.84,49.01 17.32,49.12 17.77,49.31 18.18,49.56 18.55,49.88 18.87,50.25 19.12,50.66 19.31,51.11 19.42,51.59 19.46,52.07 19.46,53.07 19.42,53.62 19.29,54.15 19.08,54.66 18.79,55.13 18.44,55.55 18.02,55.9 17.55,56.19 17.04,56.4 16.51,56.53 15.96,56.57 10.16,56.57 9.61,56.53 9.08,56.4 8.57,56.19 8.1,55.9 7.69,55.55 7.33,55.13 7.04,54.66 6.83,54.15 6.7,53.62 6.66,53.07 6.66,52.07 6.7,51.52 6.83,50.99 7.04,50.48 7.33,50.01 7.69,49.59 8.1,49.24 8.57,48.95 9.08,48.74 9.61,48.61 10.16,48.57 16.36,48.57 16.91,48.61 17.44,48.74 17.95,48.95 18.42,49.24 18.84,49.59 19.19,50.01 19.48,50.48 19.69,50.99 19.82,51.52 19.86,52.07 19.86,53.07 19.81,53.68 19.67,54.27 19.44,54.84 19.12,55.36 18.72,55.83 18.25,56.23 17.73,56.55 17.16,56.78 16.57,56.92 15.96,56.97 10.16,56.97 9.55,56.92 8.96,56.78 8.39,56.55 7.87,56.23 7.4,55.83 7,55.36 6.69,54.84 6.45,54.27 6.31,53.68 6.26,53.07 6.26,52.07 6.31,51.46 6.45,50.87 6.69,50.3 7,49.78 7.4,49.31 7.87,48.92 8.39,48.59 8.96,48.36 9.55,48.22 10.16,48.17 16.36,48.17 16.97,48.22 17.57,48.36 18.13,48.59 18.65,48.92 19.12,49.31 19.52,49.78 19.84,50.3 20.07,50.87 20.21,51.46 20.26,52.07 20.26,53.07 20.21,53.74 20.05,54.4 19.79,55.02 19.44,55.6 19,56.11 18.49,56.55 17.91,56.9 17.29,57.16 16.63,57.32 15.96,57.37 10.16,57.37 9.49,57.32 8.83,57.16 8.21,56.9 7.63,56.55 7.12,56.11 6.68,55.6 6.33,55.02 6.07,54.4 5.91,53.74 5.86,53.07 5.86,52.07 5.91,51.4 6.07,50.74 6.33,50.12 6.68,49.54 7.12,49.03 7.63,48.59 8.21,48.24 8.83,47.98 9.49,47.82 10.16,47.77 16.36,47.77 17.03,47.82 17.69,47.98 18.31,48.24 18.89,48.59 19.4,49.03 19.84,49.54 20.19,50.12 20.45,50.74 20.61,51.4 20.66,52.07 20.66,53.07 20.6,53.8 20.43,54.52 20.15,55.2 19.76,55.83 19.28,56.39 18.72,56.87 18.09,57.26 17.41,57.54 16.7,57.71 15.96,57.77 10.16,57.77 9.43,57.71 8.71,57.54 8.03,57.26 7.4,56.87 6.84,56.39 6.36,55.83 5.97,55.2 5.69,54.52 5.52,53.8 5.46,53.07 5.46,52.07 5.52,51.34 5.69,50.62 5.97,49.94 6.36,49.31 6.84,48.75 7.4,48.27 8.03,47.88 8.71,47.6 9.43,47.43 10.16,47.37 16.36,47.37 17.09,47.43 17.81,47.6 18.49,47.88 19.12,48.27 19.68,48.75 20.16,49.31 20.55,49.94 20.83,50.62 21,51.34 21.06,52.07 21.06,52.57 v21.21,52.57
  Top 0.406: v21.21,18.28 22.44,17.05 22.44,13.84 21.16,12.57 4.02,12.57 | v21.21,121.15 21.8,121.15 23.07,119.88 23.07,117.34 21.16,115.44 5.29,115.44 | v21.21,86.86 23.07,85 23.07,83.05 21.16,81.15 4.65,81.15 | v21.21,52.57 22.44,51.34 22.44,48.12 21.16,46.86 4.65,46.86
  Top 0.813: 5.29,115.44 1.48,111.62 1.48,79.88 | 1.48,79.88 1.48,44.95 | 1.48,44.95 1.48,10.66 | 1.48,10.66 1.48,3.04 | 4.02,12.57 3.38,12.57 1.48,10.66 | 4.65,46.86 3.38,46.86 1.48,44.95 | 4.65,81.15 2.75,81.15 1.48,79.88
S$2  (via drill 0.4 pad 0.5)  (3 unrouted)
  Top 0.2: v16.11,29.71 16.26,29.71 16.26,30.21 16.26,30.26 16.25,30.3 16.23,30.35 16.2,30.39 16.17,30.42 16.14,30.45 16.1,30.48 16.05,30.5 16.01,30.51 15.96,30.51 10.16,30.51 10.11,30.51 10.07,30.5 10.02,30.48 9.98,30.45 9.95,30.42 9.92,30.39 9.89,30.35 9.88,30.3 9.86,30.26 9.86,30.21 9.86,29.21 9.86,29.16 9.88,29.12 9.89,29.07 9.92,29.03 9.95,29 9.98,28.97 10.02,28.94 10.07,28.93 10.11,28.91 10.16,28.91 16.36,28.91 16.41,28.91 16.45,28.93 16.5,28.94 16.54,28.97 16.57,29 16.6,29.03 16.63,29.07 16.64,29.12 16.66,29.16 16.66,29.21 16.66,30.21 16.65,30.32 16.63,30.43 16.58,30.53 16.53,30.62 16.45,30.71 16.37,30.78 16.28,30.83 16.18,30.88 16.07,30.9 15.96,30.91 10.16,30.91 10.05,30.9 9.94,30.88 9.84,30.83 9.75,30.78 9.66,30.71 9.59,30.62 9.54,30.53 9.49,30.43 9.47,30.32 9.46,30.21 9.46,29.21 9.47,29.1 9.49,28.99 9.54,28.89 9.59,28.8 9.66,28.72 9.75,28.64 9.84,28.59 9.94,28.54 10.05,28.52 10.16,28.51 16.36,28.51 16.47,28.52 16.58,28.54 16.68,28.59 16.77,28.64 16.86,28.72 16.93,28.8 16.98,28.89 17.03,28.99 17.05,29.1 17.06,29.21 17.06,30.21 17.05,30.38 17.01,30.55 16.94,30.71 16.85,30.86 16.74,30.99 16.61,31.1 16.46,31.19 16.3,31.26 16.13,31.3 15.96,31.31 10.16,31.31 9.99,31.3 9.82,31.26 9.66,31.19 9.51,31.1 9.38,30.99 9.27,30.86 9.18,30.71 9.11,30.55 9.07,30.38 9.06,30.21 9.06,29.21 9.07,29.04 9.11,28.87 9.18,28.71 9.27,28.56 9.38,28.43 9.51,28.32 9.66,28.23 9.82,28.16 9.99,28.12 10.16,28.11 16.36,28.11 16.53,28.12 16.7,28.16 16.86,28.23 17.01,28.32 17.14,28.43 17.25,28.56 17.34,28.71 17.41,28.87 17.45,29.04 17.46,29.21 17.46,30.21 17.44,30.45 17.39,30.67 17.3,30.89 17.17,31.09 17.02,31.27 16.84,31.42 16.64,31.55 16.42,31.64 16.2,31.69 15.96,31.71 10.16,31.71 9.93,31.69 9.7,31.64 9.48,31.55 9.28,31.42 9.1,31.27 8.95,31.09 8.82,30.89 8.73,30.67 8.68,30.45 8.66,30.21 8.66,29.21 8.68,28.98 8.73,28.75 8.82,28.53 8.95,28.33 9.1,28.15 9.28,28 9.48,27.87 9.7,27.78 9.93,27.73 10.16,27.71 16.36,27.71 16.59,27.73 16.82,27.78 17.04,27.87 17.24,28 17.42,28.15 17.57,28.33 17.7,28.53 17.79,28.75 17.84,28.98 17.86,29.21 17.86,30.21 17.84,30.51 17.77,30.8 17.65,31.07 17.5,31.33 17.3,31.55 17.08,31.75 16.82,31.9 16.55,32.02 16.26,32.09 15.96,32.11 10.16,32.11 9.86,32.09 9.57,32.02 9.3,31.9 9.04,31.75 8.82,31.55 8.62,31.33 8.47,31.07 8.35,30.8 8.28,30.51 8.26,30.21 8.26,29.21 8.28,28.91 8.35,28.62 8.47,28.35 8.62,28.09 8.82,27.87 9.04,27.67 9.3,27.52 9.57,27.4 9.86,27.33 10.16,27.31 16.36,27.31 16.66,27.33 16.95,27.4 17.22,27.52 17.48,27.67 17.7,27.87 17.9,28.09 18.05,28.35 18.17,28.62 18.24,28.91 18.26,29.21 18.26,30.21 18.23,30.57 18.15,30.92 18.01,31.25 17.82,31.56 17.59,31.84 17.31,32.07 17,32.26 16.67,32.4 16.32,32.48 15.96,32.51 10.16,32.51 9.8,32.48 9.45,32.4 9.12,32.26 8.81,32.07 8.53,31.84 8.3,31.56 8.11,31.25 7.97,30.92 7.89,30.57 7.86,30.21 7.86,29.21 7.89,28.85 7.97,28.5 8.11,28.17 8.3,27.86 8.53,27.58 8.81,27.35 9.12,27.16 9.45,27.02 9.8,26.94 10.16,26.91 16.36,26.91 16.72,26.94 17.07,27.02 17.4,27.16 17.71,27.35 17.99,27.58 18.22,27.86 18.41,28.17 18.55,28.5 18.63,28.85 18.66,29.21 18.66,30.21 18.63,30.63 18.53,31.04 18.37,31.44 18.14,31.8 17.87,32.12 17.55,32.39 17.19,32.62 16.79,32.78 16.38,32.88 15.96,32.91 10.16,32.91 9.74,32.88 9.33,32.78 8.93,32.62 8.57,32.39 8.25,32.12 7.98,31.8 7.75,31.44 7.59,31.04 7.49,30.63 7.46,30.21 7.46,29.21 7.49,28.79 7.59,28.38 7.75,27.98 7.98,27.62 8.25,27.3 8.57,27.03 8.93,26.8 9.33,26.64 9.74,26.54 10.16,26.51 16.36,26.51 16.78,26.54 17.19,26.64 17.59,26.8 17.95,27.03 18.27,27.3 18.54,27.62 18.77,27.98 18.93,28.38 19.03,28.79 19.06,29.21 19.06,30.21 19.02,30.7 18.91,31.17 18.72,31.62 18.47,32.03 18.15,32.4 17.78,32.72 17.37,32.97 16.92,33.16 16.45,33.27 15.96,33.31 10.16,33.31 9.68,33.27 9.2,33.16 8.75,32.97 8.34,32.72 7.97,32.4 7.65,32.03 7.4,31.62 7.21,31.17 7.1,30.7 7.06,30.21 7.06,29.21 7.1,28.73 7.21,28.25 7.4,27.8 7.65,27.39 7.97,27.02 8.34,26.7 8.75,26.45 9.2,26.26 9.68,26.15 10.16,26.11 16.36,26.11 16.84,26.15 17.32,26.26 17.77,26.45 18.18,26.7 18.55,27.02 18.87,27.39 19.12,27.8 19.31,28.25 19.42,28.73 19.46,29.21 19.46,30.21 19.42,30.76 19.29,31.29 19.08,31.8 18.79,32.27 18.44,32.69 18.02,33.04 17.55,33.33 17.04,33.54 16.51,33.67 15.96,33.71 10.16,33.71 9.61,33.67 9.08,33.54 8.57,33.33 8.1,33.04 7.69,32.69 7.33,32.27 7.04,31.8 6.83,31.29 6.7,30.76 6.66,30.21 6.66,29.21 6.7,28.66 6.83,28.13 7.04,27.62 7.33,27.15 7.69,26.73 8.1,26.38 8.57,26.09 9.08,25.88 9.61,25.75 10.16,25.71 16.36,25.71 16.91,25.75 17.44,25.88 17.95,26.09 18.42,26.38 18.84,26.73 19.19,27.15 19.48,27.62 19.69,28.13 19.82,28.66 19.86,29.21 19.86,30.21 19.81,30.82 19.67,31.41 19.44,31.98 19.12,32.5 18.72,32.97 18.25,33.37 17.73,33.69 17.16,33.92 16.57,34.06 15.96,34.11 10.16,34.11 9.55,34.06 8.96,33.92 8.39,33.69 7.87,33.37 7.4,32.97 7,32.5 6.69,31.98 6.45,31.41 6.31,30.82 6.26,30.21 6.26,29.21 6.31,28.6 6.45,28.01 6.69,27.44 7,26.92 7.4,26.45 7.87,26.05 8.39,25.73 8.96,25.5 9.55,25.36 10.16,25.31 16.36,25.31 16.97,25.36 17.57,25.5 18.13,25.73 18.65,26.05 19.12,26.45 19.52,26.92 19.84,27.44 20.07,28.01 20.21,28.6 20.26,29.21 20.26,30.21 20.21,30.88 20.05,31.54 19.79,32.16 19.44,32.74 19,33.25 18.49,33.69 17.91,34.04 17.29,34.3 16.63,34.46 15.96,34.51 10.16,34.51 9.49,34.46 8.83,34.3 8.21,34.04 7.63,33.69 7.12,33.25 6.68,32.74 6.33,32.16 6.07,31.54 5.91,30.88 5.86,30.21 5.86,29.21 5.91,28.54 6.07,27.88 6.33,27.26 6.68,26.68 7.12,26.17 7.63,25.73 8.21,25.38 8.83,25.12 9.49,24.96 10.16,24.91 16.36,24.91 17.03,24.96 17.69,25.12 18.31,25.38 18.89,25.73 19.4,26.17 19.84,26.68 20.19,27.26 20.45,27.88 20.61,28.54 20.66,29.21 20.66,30.21 20.6,30.95 20.43,31.66 20.15,32.34 19.76,32.97 19.28,33.53 18.72,34.01 18.09,34.4 17.41,34.68 16.7,34.85 15.96,34.91 10.16,34.91 9.43,34.85 8.71,34.68 8.03,34.4 7.4,34.01 6.84,33.53 6.36,32.97 5.97,32.34 5.69,31.66 5.52,30.95 5.46,30.21 5.46,29.21 5.52,28.48 5.69,27.76 5.97,27.08 6.36,26.45 6.84,25.89 7.4,25.41 8.03,25.02 8.71,24.74 9.43,24.57 10.16,24.51 16.36,24.51 17.09,24.57 17.81,24.74 18.49,25.02 19.12,25.41 19.68,25.89 20.16,26.45 20.55,27.08 20.83,27.76 21,28.48 21.06,29.21 21.06,29.71 v21.21,29.71
  Top 0.2: v16.11,132.58 16.26,132.58 16.26,133.08 16.26,133.13 16.25,133.17 16.23,133.22 16.2,133.26 16.17,133.29 16.14,133.32 16.1,133.35 16.05,133.37 16.01,133.38 15.96,133.38 10.16,133.38 10.11,133.38 10.07,133.37 10.02,133.35 9.98,133.32 9.95,133.29 9.92,133.26 9.89,133.22 9.88,133.17 9.86,133.13 9.86,133.08 9.86,132.08 9.86,132.03 9.88,131.99 9.89,131.94 9.92,131.9 9.95,131.87 9.98,131.84 10.02,131.81 10.07,131.8 10.11,131.78 10.16,131.78 16.36,131.78 16.41,131.78 16.45,131.8 16.5,131.81 16.54,131.84 16.57,131.87 16.6,131.9 16.63,131.94 16.64,131.99 16.66,132.03 16.66,132.08 16.66,133.08 16.65,133.19 16.63,133.3 16.58,133.4 16.53,133.49 16.45,133.57 16.37,133.65 16.28,133.7 16.18,133.75 16.07,133.77 15.96,133.78 10.16,133.78 10.05,133.77 9.94,133.75 9.84,133.7 9.75,133.65 9.66,133.57 9.59,133.49 9.54,133.4 9.49,133.3 9.47,133.19 9.46,133.08 9.46,132.08 9.47,131.97 9.49,131.86 9.54,131.76 9.59,131.67 9.66,131.59 9.75,131.51 9.84,131.46 9.94,131.41 10.05,131.39 10.16,131.38 16.36,131.38 16.47,131.39 16.58,131.41 16.68,131.46 16.77,131.51 16.86,131.59 16.93,131.67 16.98,131.76 17.03,131.86 17.05,131.97 17.06,132.08 17.06,133.08 17.05,133.25 17.01,133.42 16.94,133.58 16.85,133.73 16.74,133.86 16.61,133.97 16.46,134.06 16.3,134.13 16.13,134.17 15.96,134.18 10.16,134.18 9.99,134.17 9.82,134.13 9.66,134.06 9.51,133.97 9.38,133.86 9.27,133.73 9.18,133.58 9.11,133.42 9.07,133.25 9.06,133.08 9.06,132.08 9.07,131.91 9.11,131.74 9.18,131.58 9.27,131.43 9.38,131.3 9.51,131.19 9.66,131.1 9.82,131.03 9.99,130.99 10.16,130.98 16.36,130.98 16.53,130.99 16.7,131.03 16.86,131.1 17.01,131.19 17.14,131.3 17.25,131.43 17.34,131.58 17.41,131.74 17.45,131.91 17.46,132.08 17.46,133.08 17.44,133.31 17.39,133.54 17.3,133.76 17.17,133.96 17.02,134.14 16.84,134.29 16.64,134.42 16.42,134.51 16.2,134.56 15.96,134.58 10.16,134.58 9.93,134.56 9.7,134.51 9.48,134.42 9.28,134.29 9.1,134.14 8.95,133.96 8.82,133.76 8.73,133.54 8.68,133.31 8.66,133.08 8.66,132.08 8.68,131.84 8.73,131.62 8.82,131.4 8.95,131.2 9.1,131.02 9.28,130.87 9.48,130.74 9.7,130.65 9.93,130.6 10.16,130.58 16.36,130.58 16.59,130.6 16.82,130.65 17.04,130.74 17.24,130.87 17.42,131.02 17.57,131.2 17.7,131.4 17.79,131.62 17.84,131.84 17.86,132.08 17.86,133.08 17.84,133.38 17.77,133.67 17.65,133.94 17.5,134.2 17.3,134.42 17.08,134.62 16.82,134.77 16.55,134.89 16.26,134.96 15.96,134.98 10.16,134.98 9.86,134.96 9.57,134.89 9.3,134.77 9.04,134.62 8.82,134.42 8.62,134.2 8.47,133.94 8.35,133.67 8.28,133.38 8.26,133.08 8.26,132.08 8.28,131.78 8.35,131.49 8.47,131.22 8.62,130.96 8.82,130.74 9.04,130.54 9.3,130.39 9.57,130.27 9.86,130.2 10.16,130.18 16.36,130.18 16.66,130.2 16.95,130.27 17.22,130.39 17.48,130.54 17.7,130.74 17.9,130.96 18.05,131.22 18.17,131.49 18.24,131.78 18.26,132.08 18.26,133.08 18.23,133.44 18.15,133.79 18.01,134.12 17.82,134.43 17.59,134.71 17.31,134.94 17,135.13 16.67,135.27 16.32,135.35 15.96,135.38 10.16,135.38 9.8,135.35 9.45,135.27 9.12,135.13 8.81,134.94 8.53,134.71 8.3,134.43 8.11,134.12 7.97,133.79 7.89,133.44 7.86,133.08 7.86,132.08 7.89,131.72 7.97,131.37 8.11,131.04 8.3,130.73 8.53,130.45 8.81,130.22 9.12,130.03 9.45,129.89 9.8,129.81 10.16,129.78 16.36,129.78 16.72,129.81 17.07,129.89 17.4,130.03 17.71,130.22 17.99,130.45 18.22,130.73 18.41,131.04 18.55,131.37 18.63,131.72 18.66,132.08 18.66,133.08 18.63,133.5 18.53,133.91 18.37,134.31 18.14,134.67 17.87,134.99 17.55,135.26 17.19,135.49 16.79,135.65 16.38,135.75 15.96,135.78 10.16,135.78 9.74,135.75 9.33,135.65 8.93,135.49 8.57,135.26 8.25,134.99 7.98,134.67 7.75,134.31 7.59,133.91 7.49,133.5 7.46,133.08 7.46,132.08 7.49,131.66 7.59,131.25 7.75,130.85 7.98,130.49 8.25,130.17 8.57,129.9 8.93,129.67 9.33,129.51 9.74,129.41 10.16,129.38 16.36,129.38 16.78,129.41 17.19,129.51 17.59,129.67 17.95,129.9 18.27,130.17 18.54,130.49 18.77,130.85 18.93,131.25 19.03,131.66 19.06,132.08 19.06,133.08 19.02,133.56 18.91,134.04 18.72,134.49 18.47,134.9 18.15,135.27 17.78,135.59 17.37,135.84 16.92,136.03 16.45,136.14 15.96,136.18 10.16,136.18 9.68,136.14 9.2,136.03 8.75,135.84 8.34,135.59 7.97,135.27 7.65,134.9 7.4,134.49 7.21,134.04 7.1,133.56 7.06,133.08 7.06,132.08 7.1,131.59 7.21,131.12 7.4,130.67 7.65,130.26 7.97,129.89 8.34,129.57 8.75,129.32 9.2,129.13 9.68,129.02 10.16,128.98 16.36,128.98 16.84,129.02 17.32,129.13 17.77,129.32 18.18,129.57 18.55,129.89 18.87,130.26 19.12,130.67 19.31,131.12 19.42,131.59 19.46,132.08 19.46,133.08 19.42,133.63 19.29,134.16 19.08,134.67 18.79,135.14 18.44,135.56 18.02,135.91 17.55,136.2 17.04,136.41 16.51,136.54 15.96,136.58 10.16,136.58 9.61,136.54 9.08,136.41 8.57,136.2 8.1,135.91 7.69,135.56 7.33,135.14 7.04,134.67 6.83,134.16 6.7,133.63 6.66,133.08 6.66,132.08 6.7,131.53 6.83,131 7.04,130.49 7.33,130.02 7.69,129.61 8.1,129.25 8.57,128.96 9.08,128.75 9.61,128.62 10.16,128.58 16.36,128.58 16.91,128.62 17.44,128.75 17.95,128.96 18.42,129.25 18.84,129.61 19.19,130.02 19.48,130.49 19.69,131 19.82,131.53 19.86,132.08 19.86,133.08 19.81,133.69 19.67,134.28 19.44,134.85 19.12,135.37 18.72,135.84 18.25,136.24 17.73,136.56 17.16,136.79 16.57,136.93 15.96,136.98 10.16,136.98 9.55,136.93 8.96,136.79 8.39,136.56 7.87,136.24 7.4,135.84 7,135.37 6.69,134.85 6.45,134.28 6.31,133.69 6.26,133.08 6.26,132.08 6.31,131.47 6.45,130.88 6.69,130.31 7,129.79 7.4,129.32 7.87,128.93 8.39,128.61 8.96,128.37 9.55,128.23 10.16,128.18 16.36,128.18 16.97,128.23 17.57,128.37 18.13,128.61 18.65,128.93 19.12,129.32 19.52,129.79 19.84,130.31 20.07,130.88 20.21,131.47 20.26,132.08 20.26,133.08 20.21,133.75 20.05,134.41 19.79,135.03 19.44,135.61 19,136.12 18.49,136.56 17.91,136.91 17.29,137.17 16.63,137.33 15.96,137.38 10.16,137.38 9.49,137.33 8.83,137.17 8.21,136.91 7.63,136.56 7.12,136.12 6.68,135.61 6.33,135.03 6.07,134.41 5.91,133.75 5.86,133.08 5.86,132.08 5.91,131.41 6.07,130.75 6.33,130.13 6.68,129.55 7.12,129.04 7.63,128.6 8.21,128.25 8.83,127.99 9.49,127.83 10.16,127.78 16.36,127.78 17.03,127.83 17.69,127.99 18.31,128.25 18.89,128.6 19.4,129.04 19.84,129.55 20.19,130.13 20.45,130.75 20.61,131.41 20.66,132.08 20.66,133.08 20.6,133.81 20.43,134.53 20.15,135.21 19.76,135.84 19.28,136.4 18.72,136.88 18.09,137.27 17.41,137.55 16.7,137.72 15.96,137.78 10.16,137.78 9.43,137.72 8.71,137.55 8.03,137.27 7.4,136.88 6.84,136.4 6.36,135.84 5.97,135.21 5.69,134.53 5.52,133.81 5.46,133.08 5.46,132.08 5.52,131.34 5.69,130.63 5.97,129.95 6.36,129.32 6.84,128.76 7.4,128.28 8.03,127.89 8.71,127.61 9.43,127.44 10.16,127.38 16.36,127.38 17.09,127.44 17.81,127.61 18.49,127.89 19.12,128.28 19.68,128.76 20.16,129.32 20.55,129.95 20.83,130.63 21,131.34 21.06,132.08 21.06,132.58 v21.21,132.58
  Top 0.2: v16.11,64 16.26,64 16.26,64.5 16.26,64.55 16.25,64.59 16.23,64.64 16.2,64.68 16.17,64.71 16.14,64.74 16.1,64.77 16.05,64.78 16.01,64.8 15.96,64.8 10.16,64.8 10.11,64.8 10.07,64.78 10.02,64.77 9.98,64.74 9.95,64.71 9.92,64.68 9.89,64.64 9.88,64.59 9.86,64.55 9.86,64.5 9.86,63.5 9.86,63.45 9.88,63.41 9.89,63.36 9.92,63.32 9.95,63.29 9.98,63.26 10.02,63.23 10.07,63.22 10.11,63.2 10.16,63.2 16.36,63.2 16.41,63.2 16.45,63.22 16.5,63.23 16.54,63.26 16.57,63.29 16.6,63.32 16.63,63.36 16.64,63.41 16.66,63.45 16.66,63.5 16.66,64.5 16.65,64.61 16.63,64.72 16.58,64.82 16.53,64.91 16.45,65 16.37,65.07 16.28,65.12 16.18,65.17 16.07,65.19 15.96,65.2 10.16,65.2 10.05,65.19 9.94,65.17 9.84,65.12 9.75,65.07 9.66,65 9.59,64.91 9.54,64.82 9.49,64.72 9.47,64.61 9.46,64.5 9.46,63.5 9.47,63.39 9.49,63.28 9.54,63.18 9.59,63.09 9.66,63.01 9.75,62.93 9.84,62.88 9.94,62.83 10.05,62.81 10.16,62.8 16.36,62.8 16.47,62.81 16.58,62.83 16.68,62.88 16.77,62.93 16.86,63.01 16.93,63.09 16.98,63.18 17.03,63.28 17.05,63.39 17.06,63.5 17.06,64.5 17.05,64.67 17.01,64.84 16.94,65 16.85,65.15 16.74,65.28 16.61,65.39 16.46,65.48 16.3,65.55 16.13,65.59 15.96,65.6 10.16,65.6 9.99,65.59 9.82,65.55 9.66,65.48 9.51,65.39 9.38,65.28 9.27,65.15 9.18,65 9.11,64.84 9.07,64.67 9.06,64.5 9.06,63.5 9.07,63.33 9.11,63.16 9.18,63 9.27,62.85 9.38,62.72 9.51,62.61 9.66,62.52 9.82,62.45 9.99,62.41 10.16,62.4 16.36,62.4 16.53,62.41 16.7,62.45 16.86,62.52 17.01,62.61 17.14,62.72 17.25,62.85 17.34,63 17.41,63.16 17.45,63.33 17.46,63.5 17.46,64.5 17.44,64.73 17.39,64.96 17.3,65.18 17.17,65.38 17.02,65.56 16.84,65.71 16.64,65.84 16.42,65.93 16.2,65.98 15.96,66 10.16,66 9.93,65.98 9.7,65.93 9.48,65.84 9.28,65.71 9.1,65.56 8.95,65.38 8.82,65.18 8.73,64.96 8.68,64.73 8.66,64.5 8.66,63.5 8.68,63.27 8.73,63.04 8.82,62.82 8.95,62.62 9.1,62.44 9.28,62.29 9.48,62.16 9.7,62.07 9.93,62.02 10.16,62 16.36,62 16.59,62.02 16.82,62.07 17.04,62.16 17.24,62.29 17.42,62.44 17.57,62.62 17.7,62.82 17.79,63.04 17.84,63.27 17.86,63.5 17.86,64.5 17.84,64.8 17.77,65.09 17.65,65.36 17.5,65.62 17.3,65.84 17.08,66.04 16.82,66.19 16.55,66.31 16.26,66.38 15.96,66.4 10.16,66.4 9.86,66.38 9.57,66.31 9.3,66.19 9.04,66.04 8.82,65.84 8.62,65.62 8.47,65.36 8.35,65.09 8.28,64.8 8.26,64.5 8.26,63.5 8.28,63.2 8.35,62.91 8.47,62.64 8.62,62.38 8.82,62.16 9.04,61.96 9.3,61.81 9.57,61.69 9.86,61.62 10.16,61.6 16.36,61.6 16.66,61.62 16.95,61.69 17.22,61.81 17.48,61.96 17.7,62.16 17.9,62.38 18.05,62.64 18.17,62.91 18.24,63.2 18.26,63.5 18.26,64.5 18.23,64.86 18.15,65.21 18.01,65.54 17.82,65.85 17.59,66.13 17.31,66.36 17,66.55 16.67,66.69 16.32,66.77 15.96,66.8 10.16,66.8 9.8,66.77 9.45,66.69 9.12,66.55 8.81,66.36 8.53,66.13 8.3,65.85 8.11,65.54 7.97,65.21 7.89,64.86 7.86,64.5 7.86,63.5 7.89,63.14 7.97,62.79 8.11,62.46 8.3,62.15 8.53,61.87 8.81,61.64 9.12,61.45 9.45,61.31 9.8,61.23 10.16,61.2 16.36,61.2 16.72,61.23 17.07,61.31 17.4,61.45 17.71,61.64 17.99,61.87 18.22,62.15 18.41,62.46 18.55,62.79 18.63,63.14 18.66,63.5 18.66,64.5 18.63,64.92 18.53,65.33 18.37,65.73 18.14,66.09 17.87,66.41 17.55,66.68 17.19,66.91 16.79,67.07 16.38,67.17 15.96,67.2 10.16,67.2 9.74,67.17 9.33,67.07 8.93,66.91 8.57,66.68 8.25,66.41 7.98,66.09 7.75,65.73 7.59,65.33 7.49,64.92 7.46,64.5 7.46,63.5 7.49,63.08 7.59,62.67 7.75,62.27 7.98,61.91 8.25,61.59 8.57,61.32 8.93,61.09 9.33,60.93 9.74,60.83 10.16,60.8 16.36,60.8 16.78,60.83 17.19,60.93 17.59,61.09 17.95,61.32 18.27,61.59 18.54,61.91 18.77,62.27 18.93,62.67 19.03,63.08 19.06,63.5 19.06,64.5 19.02,64.98 18.91,65.46 18.72,65.91 18.47,66.32 18.15,66.69 17.78,67.01 17.37,67.26 16.92,67.45 16.45,67.56 15.96,67.6 10.16,67.6 9.68,67.56 9.2,67.45 8.75,67.26 8.34,67.01 7.97,66.69 7.65,66.32 7.4,65.91 7.21,65.46 7.1,64.98 7.06,64.5 7.06,63.5 7.1,63.02 7.21,62.54 7.4,62.09 7.65,61.68 7.97,61.31 8.34,60.99 8.75,60.74 9.2,60.55 9.68,60.44 10.16,60.4 16.36,60.4 16.84,60.44 17.32,60.55 17.77,60.74 18.18,60.99 18.55,61.31 18.87,61.68 19.12,62.09 19.31,62.54 19.42,63.02 19.46,63.5 19.46,64.5 19.42,65.05 19.29,65.58 19.08,66.09 18.79,66.56 18.44,66.97 18.02,67.33 17.55,67.62 17.04,67.83 16.51,67.96 15.96,68 10.16,68 9.61,67.96 9.08,67.83 8.57,67.62 8.1,67.33 7.69,66.97 7.33,66.56 7.04,66.09 6.83,65.58 6.7,65.05 6.66,64.5 6.66,63.5 6.7,62.95 6.83,62.42 7.04,61.91 7.33,61.44 7.69,61.02 8.1,60.67 8.57,60.38 9.08,60.17 9.61,60.04 10.16,60 16.36,60 16.91,60.04 17.44,60.17 17.95,60.38 18.42,60.67 18.84,61.02 19.19,61.44 19.48,61.91 19.69,62.42 19.82,62.95 19.86,63.5 19.86,64.5 19.81,65.11 19.67,65.7 19.44,66.27 19.12,66.79 18.72,67.26 18.25,67.66 17.73,67.97 17.16,68.21 16.57,68.35 15.96,68.4 10.16,68.4 9.55,68.35 8.96,68.21 8.39,67.97 7.87,67.66 7.4,67.26 7,66.79 6.69,66.27 6.45,65.7 6.31,65.11 6.26,64.5 6.26,63.5 6.31,62.89 6.45,62.3 6.69,61.73 7,61.21 7.4,60.74 7.87,60.34 8.39,60.02 8.96,59.79 9.55,59.65 10.16,59.6 16.36,59.6 16.97,59.65 17.57,59.79 18.13,60.02 18.65,60.34 19.12,60.74 19.52,61.21 19.84,61.73 20.07,62.3 20.21,62.89 20.26,63.5 20.26,64.5 20.21,65.17 20.05,65.83 19.79,66.45 19.44,67.03 19,67.54 18.49,67.98 17.91,68.33 17.29,68.59 16.63,68.75 15.96,68.8 10.16,68.8 9.49,68.75 8.83,68.59 8.21,68.33 7.63,67.98 7.12,67.54 6.68,67.03 6.33,66.45 6.07,65.83 5.91,65.17 5.86,64.5 5.86,63.5 5.91,62.83 6.07,62.17 6.33,61.55 6.68,60.97 7.12,60.46 7.63,60.02 8.21,59.67 8.83,59.41 9.49,59.25 10.16,59.2 16.36,59.2 17.03,59.25 17.69,59.41 18.31,59.67 18.89,60.02 19.4,60.46 19.84,60.97 20.19,61.55 20.45,62.17 20.61,62.83 20.66,63.5 20.66,64.5 20.6,65.23 20.43,65.95 20.15,66.63 19.76,67.26 19.28,67.82 18.72,68.3 18.09,68.69 17.41,68.97 16.7,69.14 15.96,69.2 10.16,69.2 9.43,69.14 8.71,68.97 8.03,68.69 7.4,68.3 6.84,67.82 6.36,67.26 5.97,66.63 5.69,65.95 5.52,65.23 5.46,64.5 5.46,63.5 5.52,62.77 5.69,62.05 5.97,61.37 6.36,60.74 6.84,60.18 7.4,59.7 8.03,59.31 8.71,59.03 9.43,58.86 10.16,58.8 16.36,58.8 17.09,58.86 17.81,59.03 18.49,59.31 19.12,59.7 19.68,60.18 20.16,60.74 20.55,61.37 20.83,62.05 21,62.77 21.06,63.5 21.06,64 v21.21,64